# Altium PCB Main.PcbDoc
Units mil, origin at the board's own origin, x right, y up, seen from the top; angles counter-clockwise.
Board outline 1110 x 1430 mil, 2 copper layers (Top Layer, Bottom Layer); 16 components, 11 nets, 40 pads, 0 vias.
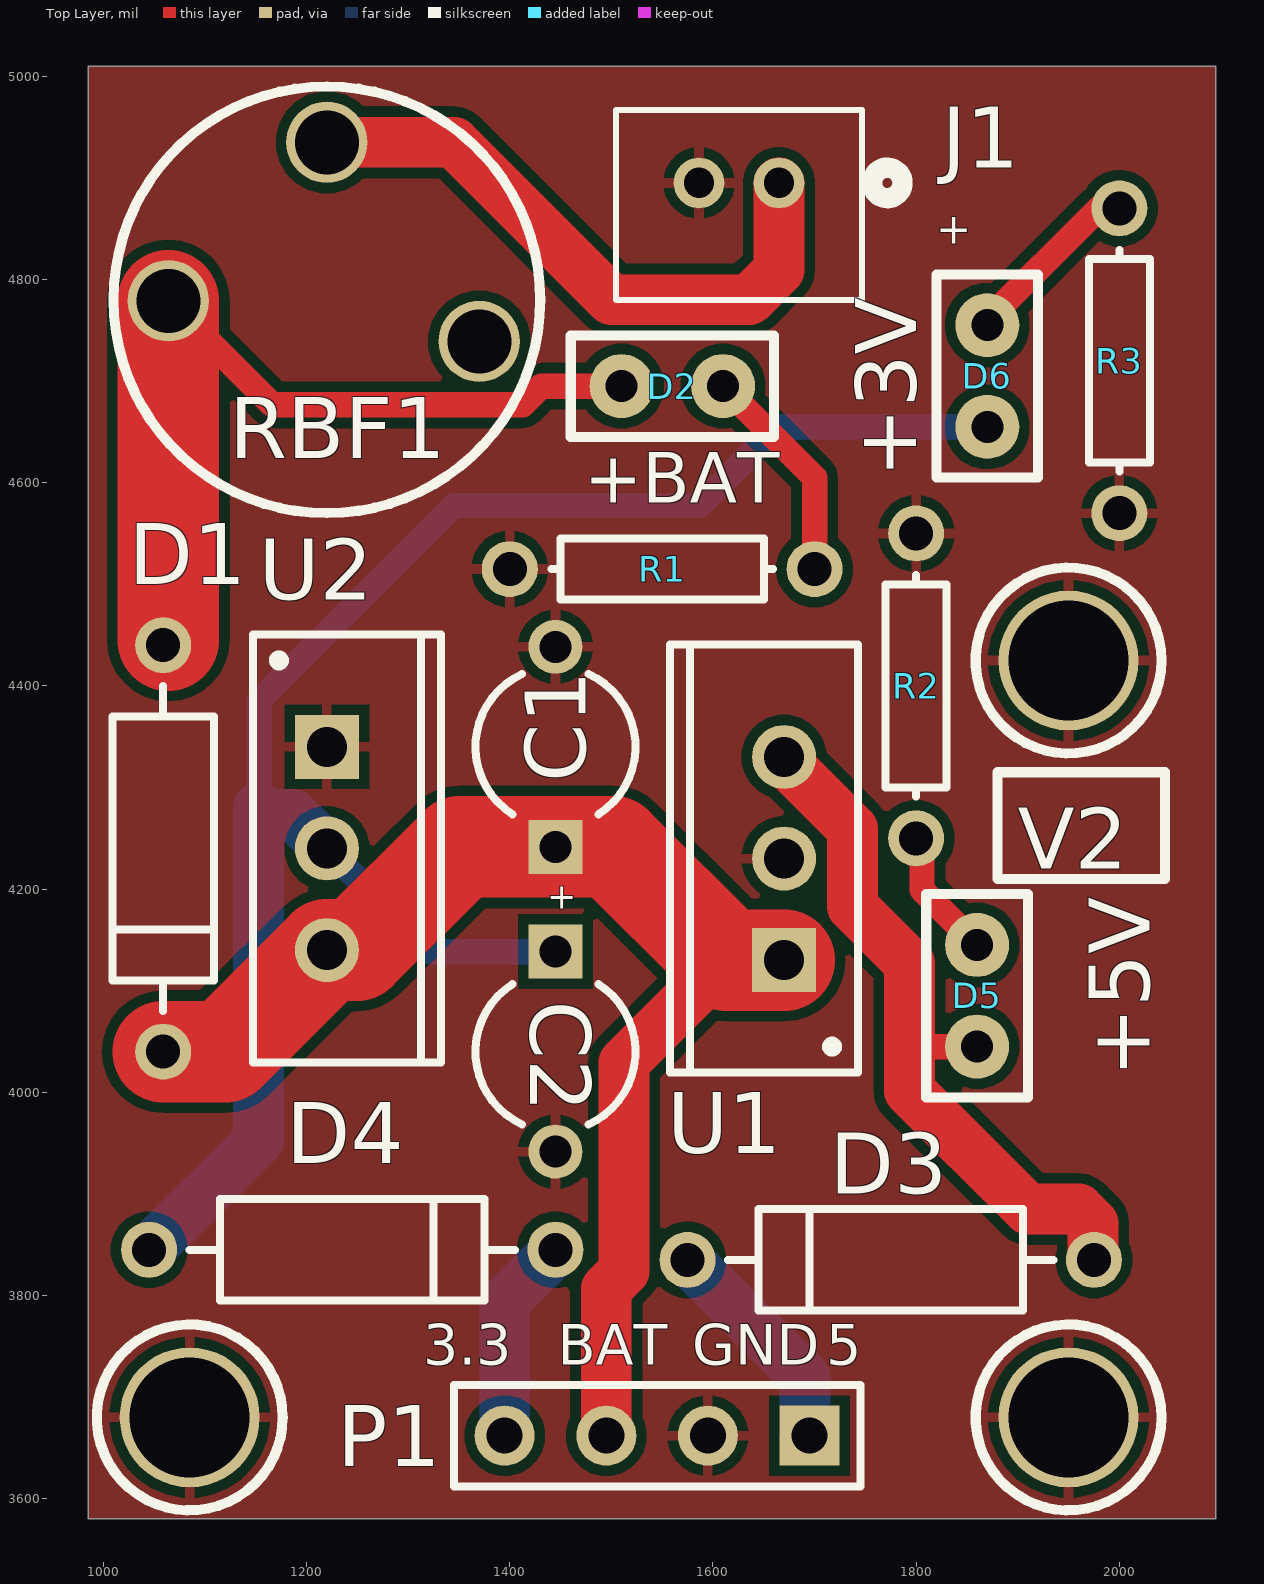
[diagram p0: Top Layer view]
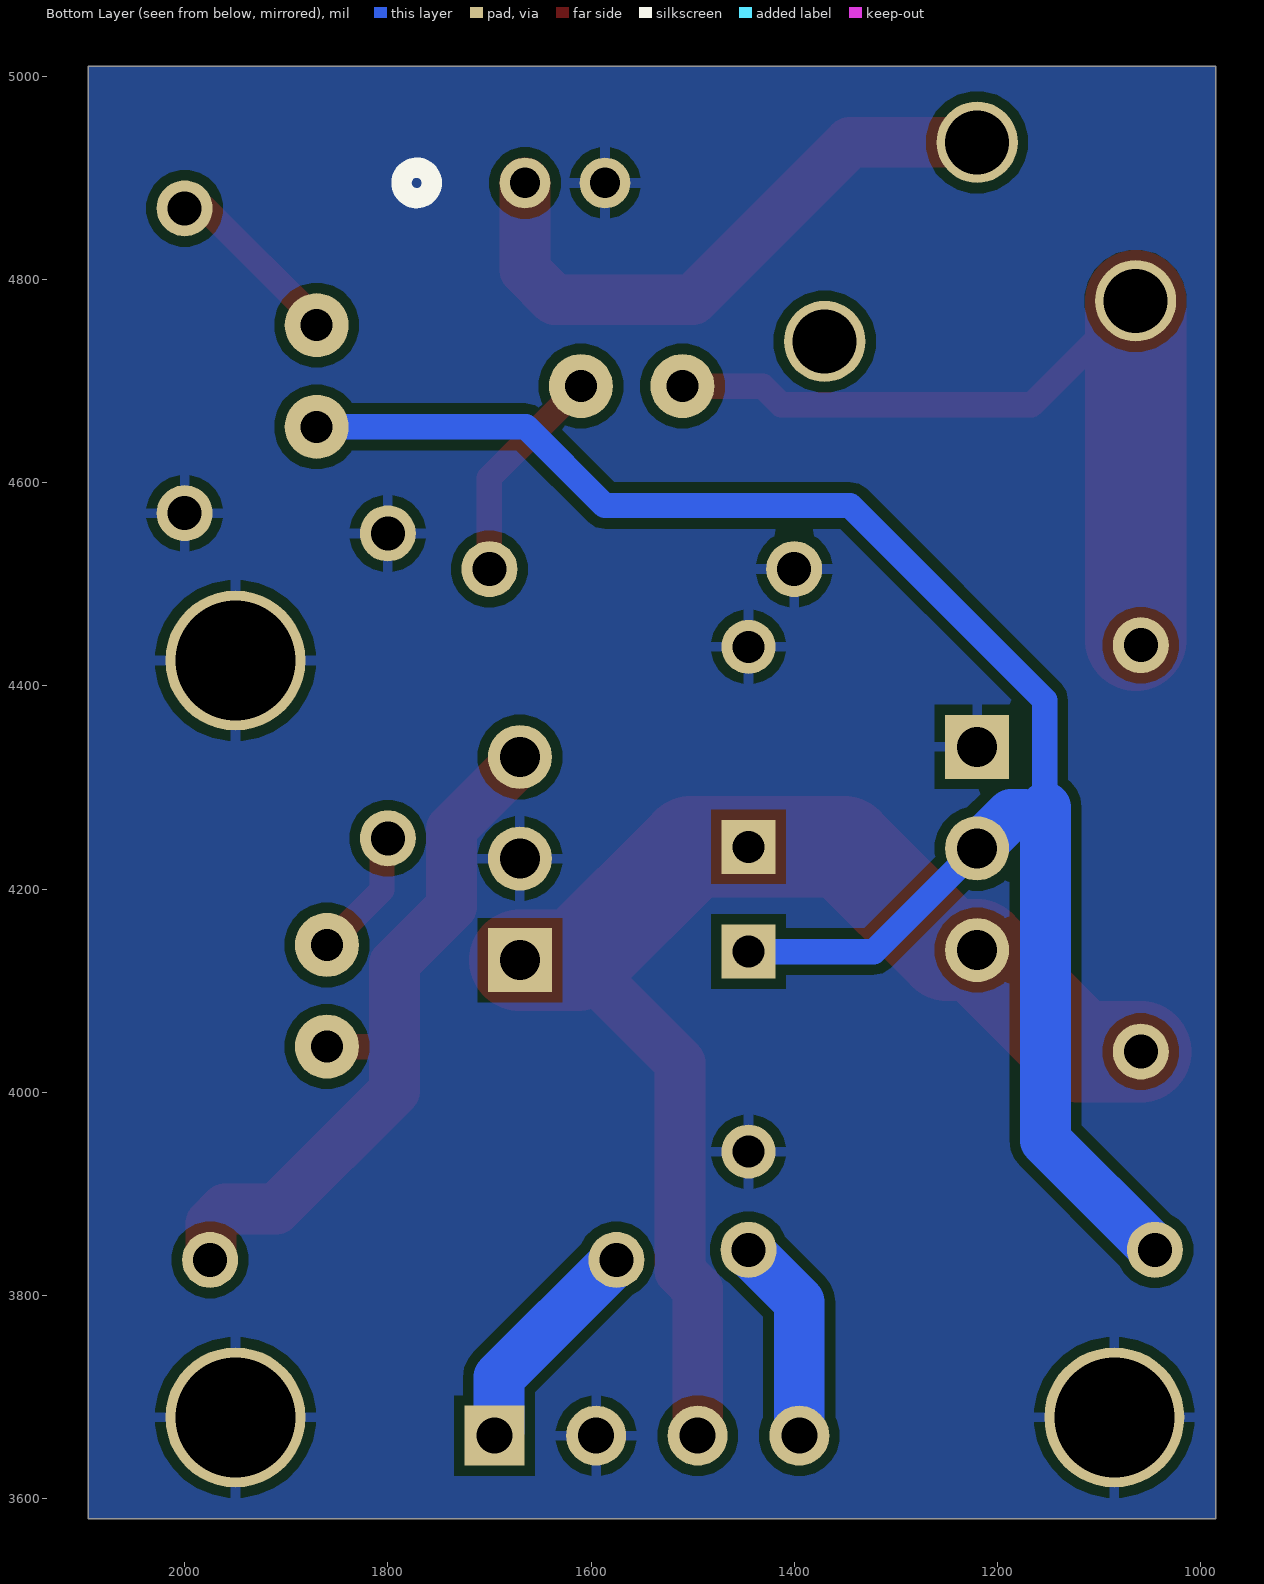
[diagram p1: Bottom Layer view, seen from below]

## Layer stack, top to bottom
Top Solder: solder mask 0.4, Solder Resist, Dk 3.5
Top Layer: signal copper 1.4
Dielectric 1: dielectric 12.6, FR-4, Dk 4.8
Bottom Layer: signal copper 1.4
Bottom Solder: solder mask 0.4, Solder Resist, Dk 3.5

## Board outline
985,3580 2095,3580 2095,5010 985,5010

## Design rules (kind name [scope] priority, off if disabled: settings)
Clearance [All] p1: gap=10 ignorepadtopadclearanceinfootprint=FALSE except(0: Arc-Hole Track-Hole SMDPad-Hole THPad-Hole Via-Hole Fill-Hole Poly-Hole Region-Hole Text-Hole)
HoleSize [All] p1: absolutevalues=TRUE maxlimit=1000 minlimit=1 maxpercent=80.000 minpercent=20.000
PolygonConnect [All] p1: connectstyle=Relief reliefconductorwidth=10 reliefentries=4 polygonreliefangle="90 Angle" airgapwidth=10
RoutingVias [All] p1: holewidth=28 width=50 viastyle="Through Hole" minholewidth=28 minwidth=50 maxholewidth=28 maxwidth=50
SolderMaskExpansion [All] p1: expansion=4 istentingtop=FALSE
Width [All] p1: maxlimit=100 minlimit=15 preferedwidth=50 minimp=50.000000 maximp=50.000000 favimp=50.000000
29 further rules are at their usual default settings.

## Components (designator, comment, footprint, x,y, rotation, side; value= is the part's Value field where it differs from the comment)
C1 ".33 uF" CAPR5-4X5 1445,4340 r90 top
C2 "10 uF" CAPR5-4X5 1445,4040 r270 top
D1 "Diode" DIODE-0.4 1058.94,4240 r270 top
D2 "+BAT" LED-1 1560,4695 r90 top
D3 "Diode" DIODE-0.4 1775,3835 r180 top
D4 "Diode" DIODE-0.4 1245,3845 r0 top
D5 "+5V" LED-1 1860,4095 r180 top
D6 "+3V" LED-1 1870,4705 r180 top
J1 "B2B-PH-K-S" CONN2_B2B-PH-K-S_JST 1665,4895 r0 top
P1 "MHDR1X4" HDR1X4 1695,3662 r180 top
R1 "Res1" AXIAL-0.3 1550,4515 r0 top value=1K
R2 "Res1" AXIAL-0.3 1800,4400 r270 top value=1K
R3 "Res1" AXIAL-0.3 2000,4720 r90 top value=1K
RBF1 "PinSwitch" SwitchPin 1220,4935 r0 top
U1 "LM340" TO-220AB 1670,4230 r90 top
U2 "LD1117V33C" TO-220AB 1220,4240 r270 top

## Footprints (in the part's own frame and the unit in brackets; to place one, negate y for a bottom-side part, rotate by r counter-clockwise, add the part's x,y. Pads: shape width x height; smd on the part's side, far side on the other; paste and mask are expansions set on the pad)
AXIAL-0.3 [mm] "Axial Device, Thru-Hole; 2 Leads; 0.3 in Pin Spacing"
  round 1.4 hole 0.85: 1(-3.81,0) 2(3.81,0)
  silkscreen extent -2.77,-0.76 2.77,0.76
CAPR5-4X5 [mm] "Capacitor; 2 Leads"
  rect 1.35x1.35 hole 0.8: 1(-2.5,0)
  round 1.35 hole 0.8: 2(2.5,0)
  silkscreen extent -1.69,-2 1.82,2
CONN2_B2B-PH-K-S_JST [mil]
  round 50 / inner round 60 / far side round 50 hole 30 paste-25 mask+0: 1(0,0) 2(-78.74,0)
  silkscreen extent -160,-115 122,72
DIODE-0.4 [mm] "Diode, Thru-Hole; 2 Leads; 0.4 in Pin Spacing"
  round 1.4 hole 0.85: 1(-5.08,0) 2(5.08,0)
  silkscreen extent -4.06,-1.27 4.06,1.27
HDR1X4 [mm] "Connector; Header; 4 Position"
  rect 1.5x1.5 hole 0.9: 1(0,0)
  round 1.5 hole 0.9: 2(2.54,0) 3(5.08,0) 4(7.62,0)
  silkscreen extent -1.27,-1.27 8.89,1.27
LED-1 [mm] "LED; 2 Leads"
  round 1.6 hole 0.8: 1(0,1.27) 2(0,-1.27)
  silkscreen extent -1.27,-2.54 1.27,2.54
SwitchPin [mil]
  round 80 hole 63: 0(150,-196) 1(0,0) 2(-156,-156)
  silkscreen extent -210,-365 210,55
TO-220AB [mm] "TO, Thru-Hole, Vertical, Heatsink Mounted; 3 In-Line Leads; Pitch 2.54 mm"
  rect 1.6x1.6 hole 1: 1(-2.54,0)
  round 1.6 hole 1: 2(0,0) 3(2.54,0)
  silkscreen extent -5.35,-1.85 5.35,2.85, body extent -5.4,-1.9 5.4,2.9, height 19.3

## Part data
C1 C2: library part "Electrolytic Capacitor", "Filter Capacitor"
D1 D3 D4: "Default Diode", Code_JEDEC=DO-214-AB, LatestRevisionDate=17-Jul-2002, LatestRevisionNote="Re-released for DXP Platform.", PackageDescription="DO-214-AB/SMC; 2 C-Bend Leads; Body 7.9 x 5.9 mm, inc. leads (LxW)", PackageReference=SMC, PackageVersion=Sep-1996, Published=8-Jun-2000, Publisher="Altium Limited"
D2 D5 D6: library part LED1, "Typical RED GaAs LED", LatestRevisionDate=08-Jul-2005, LatestRevisionNote="Mech Layer 1 removed.", PackageDescription="LED; 2 Leads", PackageReference=LED-1, Published=8-Jun-2000, Publisher="Altium Limited"
J1: "No Description Available", Mfr_Name=JST, RefDes=RefDes, Type=Type
P1: "Header, 4-Pin", LatestRevisionDate=17-Jul-2002, LatestRevisionNote="Re-released for DXP Platform.", Publisher="Altium Limited"
R1 R2 R3: "Resistor", LatestRevisionDate=17-Jul-2002, LatestRevisionNote="Re-released for DXP Platform.", PackageDescription="Axial Device, Thru-Hole; 2 Leads; 0.3 in Pin Spacing", PackageReference=AXIAL-0.3, Published=8-Jun-2000, Publisher="Altium Limited"
RBF1: "RBF pin for turning on/off payload"
U1: library part "LDO 5V", "LM340 LDO 5V Out"
U2: library part "LDO 3V3", "STM LD1117V33C LDO. Different pinout from 5V LDO"

## Free pads (board coordinates)
  round 137.8 hole 118.11: 1(1085,3680) 1(1950,3680) 1(1950,4425)

## Nets (pads, with @x,y where several pads share a name; then routed paths per layer and width w, separated by ;. In a path a pad name is that pad's centre, name@x,y a point inside that pad or via, vN(x,y) a via of type N, cw(c..) or ccw(c..) an arc to the next point about the centre after c; other vN are vias at no path point)
+3V3: C2.1 D4.1 D6.1 U2.2 | length 1737
  Bottom Layer w25: 1152.7,4280.29 1159.96,4287.55 ; 1153.5,4294.01 1153.5,4385.99 1345.07,4577.56 1586.6,4577.56 1664.04,4655 D6.1 ; U2.2 1321.57,4138.43 C2.1
  Bottom Layer w50: D4.1 1152.7,3952.7 1152.7,4280.29 ; 1174.01,4273.5 1186.5,4273.5 U2.2
+5: D3.1 D5.1 U1.3 | length 719.9
  Top Layer w25: 1793.5,4051.6 1800.1,4045 D5.1
  Top Layer w50: U1.3 1670,4326.48 1737.44,4259.04 1737.44,4182.77 1793.5,4126.7 1793.5,4051.6 1793.5,4001.5 1910,3885 1960,3885 1974.02,3870.98 1974.02,3835.98 D3.1
GND: C1.2 C2.2 J1.2 P1.2 pad.1 R1.1 R2.1 R3.1 U1.2 U2.1
NetD1_1: D1.1 D2.1 RBF1.2 | length 830.1
  Top Layer w25: RBF1.2 1166.5,4676.5 1412.67,4676.5 1431.17,4695 D2.1
  Top Layer w100: D1.1@1064,4445.06 RBF1.2
NetD2_2: D2.2 R1.2 | length 217.3
  Top Layer w25: D2.2 1700,4605 R1.2
NetD3_2: D3.2 P1.1 | length 222.7
  Bottom Layer w50: D3.2 1690.47,3719.53 1690.47,3666.53 P1.1
NetD4_2: D4.2 P1.4 | length 203.7
  Bottom Layer w50: P1.4 1395,3793.61 1445,3843.61 D4.2
NetD5_2: D5.2 R2.2 | length 129.9
  Top Layer w25: R2.2 1805.76,4244.24 1805.76,4199.24 D5.2
NetD6_2: D6.2 R3.2 | length 180.6
  Top Layer w25: D6.2 1870,4760 1980,4870 R3.2
NetJ1_2: J1.1 RBF1.1 | length 607
  Top Layer w50: RBF1.1 1345,4935 1500,4780 1635.71,4780 1665,4809.29 J1.1
VCC: C1.1 D1.2 P1.3 U1.1 U2.3 | length 1257.8
  Top Layer w50: P1.3 1495,3806.53 1512.44,3823.97 1512.44,4029.15 1613.29,4130
  Top Layer w100: D1.2 1120,4040 U2.3 1249.39,4140 1350.97,4241.57 C1.1 1501.71,4241.57 1613.29,4130 U1.1
pads on no net: RBF1.0

## Polygon pours and split planes (outlines as drawn)
GND on Top Layer "GND_L01_P000" (solid, pour order 0): 985,5010 2095,5010 2095,3580 985,3580
GND on Bottom Layer "GND_L02_P001" (solid, pour order 1): 985,5010 2095,5010 2095,3580 985,3580

## Silkscreen, mask and mechanical layers (free items; w line width, h text height)
Top Overlay:
  circle w10: c1085,3680 r91.5
  circle w10: c1950,3680 r91.5
  circle w10: c1950,4425 r91.5
  lines w10: 1880,4210 2045,4210 2045,4315 1880,4315 1880,4210
  text "+" at 1820,4835 h30
  text "V2" at 1900,4220 h60
  text "+" at 1436.67,4180.83 h25
  text "3.3" at 1315.02,3731.6 h40
  text "BAT" at 1447.23,3731.6 h40
  text "GND" at 1579.45,3731.6 h40
  text "5" at 1711.67,3731.6 h40